# Allegro board ESP322.brd
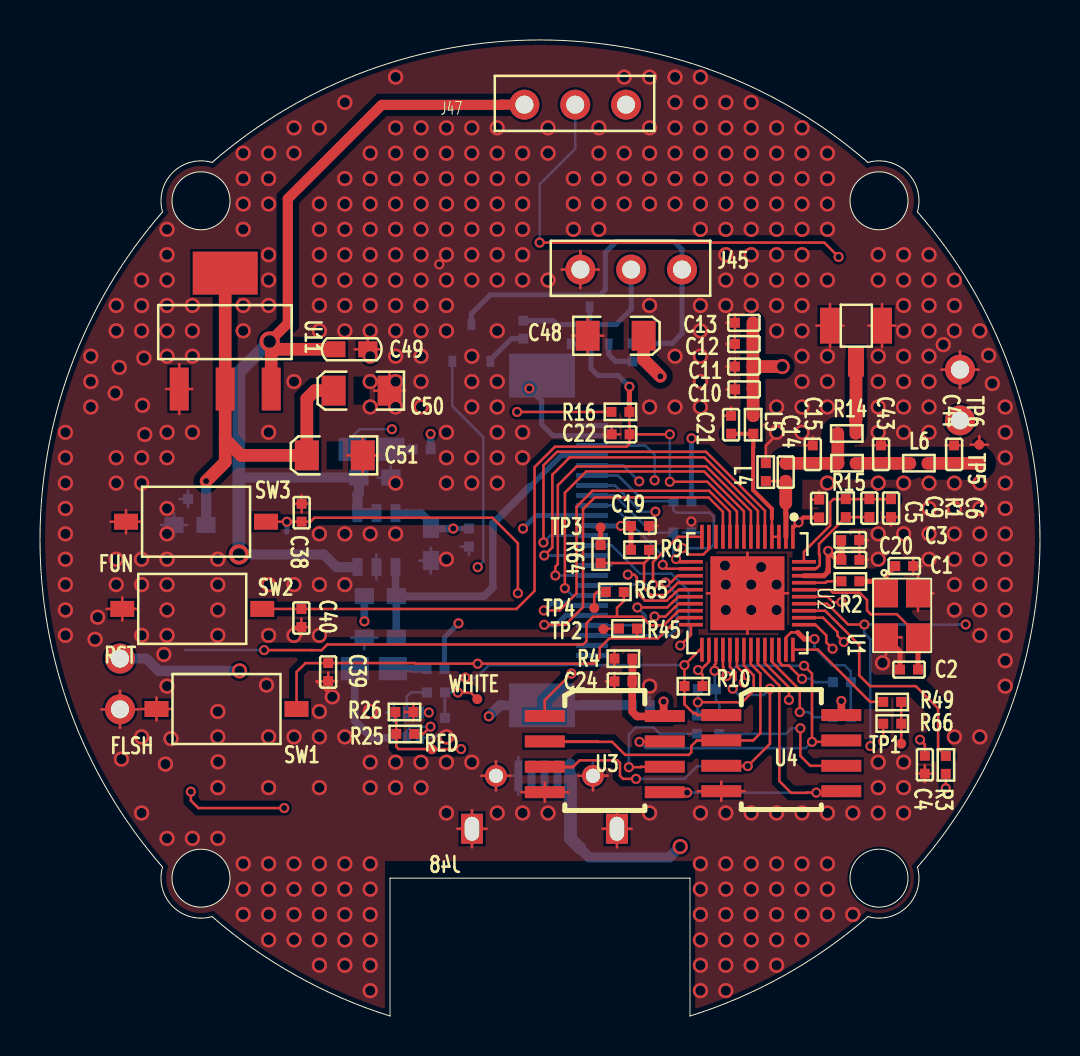
[diagram p0: board, top side]
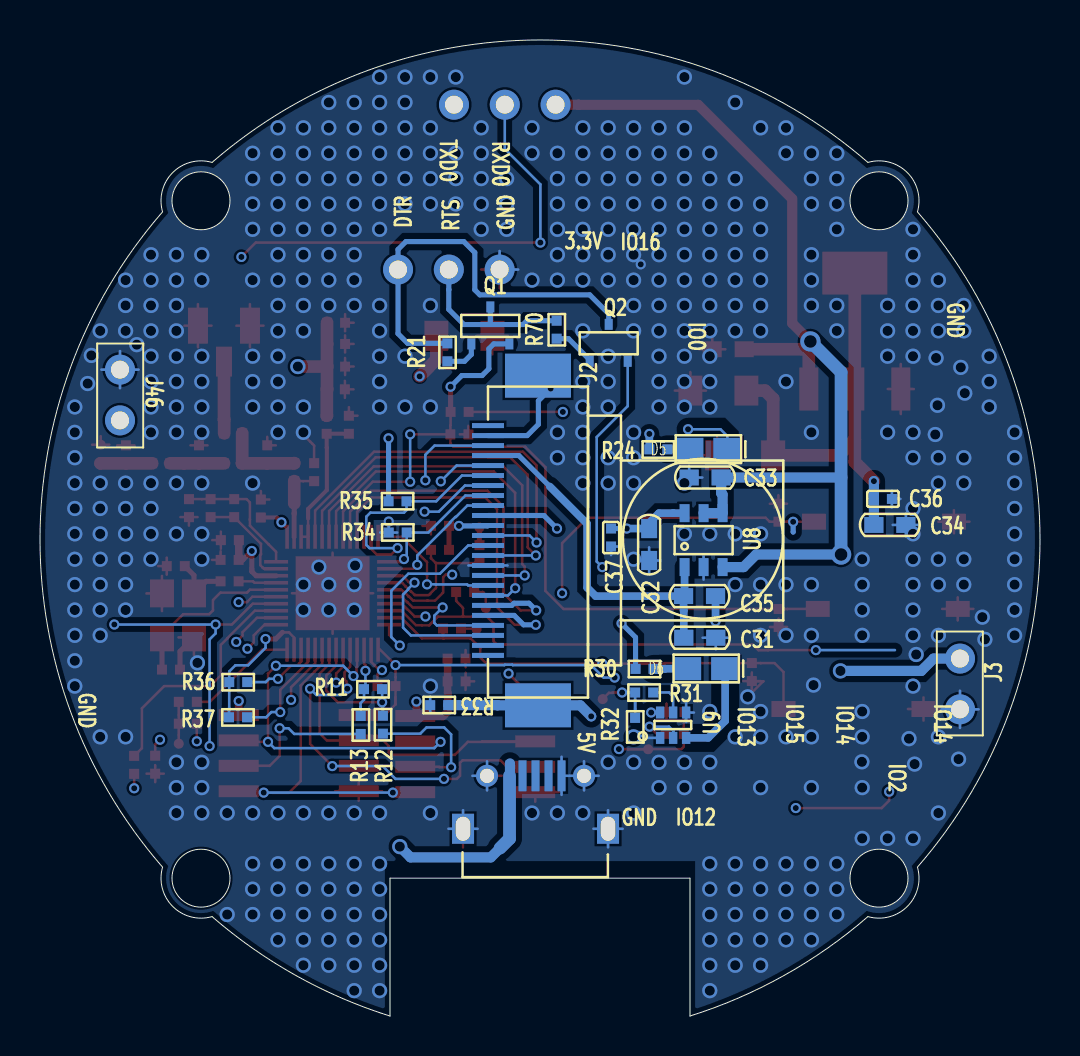
[diagram p1: board, bottom side, seen from below]

Outline 50 x 48.85 mm; copper layers: TOP, GND, SIG, BOTTOM. Coordinates in mm from the lower left corner of the outline.
Outline path: circle c8.05,40.8 r1.45 ; circle c8.05,6.9 r1.45 ; circle c41.95,40.8 r1.45 ; circle c41.95,6.9 r1.45 ; 6.13,40.25 arc(6.64,42.21) 8.6,42.72 arc(25,48.85) 41.4,42.72 arc(43.36,42.21) 43.87,40.25 arc(50,23.85) 43.87,7.45 arc(43.36,5.48) 41.4,4.98 arc(37.2,2.03) 32.5,0 32.5,6.9 17.5,6.9 17.5,0 arc(12.8,2.03) 8.6,4.98 arc(6.64,5.48) 6.13,7.45 arc(0,23.85) 6.13,40.25

## Design rules (mm)
net group DTR: nets DTR N16908429
net group IO21: nets IO21 N16845223
net group IO22: nets IO22 N16845342
net group RTS: nets N16908427 RTS
net group RF: nets N16845246 N16845248 N16845297 N16845299 N16860839 N16860948 N16861170 N16861179 N16861214 N16861260 N16861530 N16861598 N16861944 N16863419 N16863538 N16884685

## Placement (name value [footprint] x y rotation side)
C1  22pF/6.3V(10%)  [C0402]  42.76 22.52 0 top
C2  22pF/6.3V(10%)  [C0402]  43.9 17.34 180 top
C3  100pF/6.3V(10%)  [C0402]  40.06 23.82 0 top
C4  0.1uF/6.3V(10%)  [C0402]  44.24 13.03 270 top
C5  10nF/6.3V(10%)  [C0402]  42.55 25.87 270 top
C6  3.3nF/6.3V(10%)  [C0402]  41.47 24.97 90 top
C9  0.1uF/6.3V(10%)  [C0402]  38.96 24.95 90 top
C10  0.1uF/6.3V(10%)  [C0402]  35.66 31.36 180 top
C11  1uF/10V(20%)  [C0402]  35.65 32.5 180 top
C12  10uF/6.3V(20%)  [C0402]  35.65 33.64 180 top
C13  10uF/6.3V(20%)  [C0402]  35.65 34.7 180 top
C14  6.8pF  [C0402]  37.29 26.77 90 top
C15  2.4pF  [C0402]  38.64 28.56 270 top
C19  0.1uF/6.3V(10%)  [C0402]  29.55 24.53 0 top
C20  1uF/10V(20%)  [C0402]  40.07 22.83 0 top
C21  NC  [C0402]  34.55 29.14 90 top
C22  1uF/10V(20%)  [C0402]  29.48 29.11 180 top
C24  1uF/10V(20%)  [C0402]  29.62 16.75 180 top
C31  10uF/10V(20%)  [C0603]  16.21 18.93 0 bottom
C32  10uF/10V(20%)  [C0603]  19.54 22.8 90 bottom
C33  10uF/10V(20%)  [C0603]  17.54 26.95 180 bottom
C34  4.7uF/10V(20%)  [C0603]  8.3 24.58 180 bottom
C35  4.7uF/10V(20%)  [C0603]  17.82 21.02 180 bottom
C36  0.1uF/16V(10%)  [C0402]  8.3 25.88 180 bottom
C37  1uF/10V(20%)  [C0402]  21.44 24.4 270 bottom
C38  0.1uF/16V(10%)  [C0402]  13.08 25.64 270 top
C39  0.1uF/16V(10%)  [C0402]  14.41 16.77 90 top
C40  0.1uF/16V(10%)  [C0402]  13.07 19.47 90 top
C43  1.0pF  [C0402]  42.05 28.56 270 top
C44  1.5pF  [C0402]  45.7 28.56 270 top
C48  47uF/6.3V(20%)  [C1206]  30.18 34.05 0 top
C49  10uF/16V  [C0603]  14.79 33.37 0 top
C50  22uF/16V  [C1206]  14.68 31.3 180 top
C51  10uF/16V  [C1206]  13.34 28.06 180 top
D5  RED LED  [LED0805]  17.53 28.36 180 bottom
D6  WHITE LED  [LED0805]  17.64 17.38 180 bottom
J2  FFC_24P_0P5  [OV9650FSL_PCB]  27.6 29.55 90 bottom
J3  CON2  [CON_2_54_2P]  4 15.35 90 bottom
J39  IPEX(NC)  [ECT8180001581]  40.8 32.75 0 top
J45  CON3  [CON_2_54_3P]  27.02 37.36 0 top
J46  CON2  [CON_2_54_2P]  46 32.35 270 bottom
J47  CON3  [CON_2_54_3P]  24.22 45.61 0 top
J48  CON9  [MICROUSB]  23.92 12.02 0 bottom
L4  2.4nH  [R0402]  36.29 26.77 90 top
L5  2.0nH  [R0402]  35.67 29.14 90 top
L6  2.0nH  [R0402]  43.49 27.66 0 top
Q1  S8050(NPN)  [SOT23-3]  27.48 35.49 180 bottom
Q2  S8050(NPN)  [SOT23-3]  21.57 34.62 180 bottom
R1  20K(5%)  [R0402]  40.29 24.97 90 top
R2  51R(5%)  [R0402]  40.97 21.76 180 top
R3  499R(1%)  [R0402]  45.29 13.02 270 top
R4  2K(5%)(NC)  [R0402]  29.62 17.89 180 top
R9  10K(1%)(NC)  [R0402]  29.55 23.33 0 top
R10  10K(1%)  [R0402]  33.12 16.51 180 top
R11  0R(5%)(NC)  [R0402]  32.9 16.36 0 bottom
R12  0R(5%)  [R0402]  32.85 15.03 270 bottom
R13  0R(5%)  [R0402]  33.96 15.02 270 bottom
R14  0R(5%)  [R0402]  40.79 29.16 180 top
R15  0R(5%)  [R0402]  39.9 27.66 0 top
R16  10K(1%)  [R0402]  28.57 30.23 0 top
R21  12K(1%)  [R0402]  29.63 33.67 270 bottom
R24  1K(1%)  [R0402]  18.63 28.36 0 bottom
R25  1K(1%)  [R0402]  18.71 14.12 180 top
R26  10K(1%)  [R0402]  17.77 15.21 0 top
R30  1K(1%)  [R0402]  19.32 17.37 0 bottom
R31  1K(1%)  [R0402]  19.34 16.19 0 bottom
R32  10K(1%)  [R0402]  20.24 14.92 270 bottom
R33  0R(5%)  [R0402]  30.49 15.56 180 bottom
R34  10K(1%)  [R0402]  32.56 24.2 180 bottom
R35  10K(1%)  [R0402]  32.57 25.76 180 bottom
R36  3.3K(5%)  [R0402]  39.64 16.71 0 bottom
R37  3.3K(5%)  [R0402]  39.65 14.95 0 bottom
R45  0R(5%)  [R0402]  28.95 19.39 0 top
R49  0R(5%)  [R0402]  43.06 15.72 180 top
R64  0R(5%)  [R0402]  28.03 23.57 270 top
R65  0R(5%)  [R0402]  28.29 21.22 0 top
R66  10K(1%)  [R0402]  42.16 14.63 0 top
R70  12K(1%)  [R0402]  24.17 34.8 270 bottom
RED  Red  [TP1]  19.59 13.35 0 top
SW1  SW PUSHBUTTON  [KEY_3X6]  5.83 15.37 0 top
SW2  SW PUSHBUTTON  [KEY_3X6]  4.11 20.38 0 top
SW3  SW PUSHBUTTON  [KEY_3X6]  4.3 24.74 0 top
TP1  Red  [TP1]  43.06 13.63 0 top
TP2  Red  [TP1]  28.17 19.36 0 top
TP3  Red  [TP1]  28.03 24.45 0 top
TP4  Red  [TP1]  27.71 20.42 0 top
TP5  Red  [TP1]  46.97 27.66 0 top
TP6  Red  [TP1]  46.96 28.59 0 top
U1  40MHz+/-10ppm  [CRY_3225]  43.9 21.15 270 top
U2  ESP32-D0WD  [QFN48_5X5]  35.37 21.16 270 top
U3  EN25QH128A  [RZ7889]  28.32 9.99 0 top
U4  PSRAM  [RZ7889]  37.15 10.04 0 top
U8  RT9011-BM-PJ6  [SOT-23-6]  16.82 23.82 180 bottom
U9  SI1902CDL  [SOT363]  18.99 13.92 180 bottom
U11  TLV1117-33IDCY  [SOT223]  6.96 31.38 0 top
WHITE  Red  [TP1]  21.87 15.86 0 top

## Library data of the parts
C1-C6 C9-C15 C19-C22 C24 C31-C40 C43 C44 C48-C51 = CAP NP
D5 D6 = LED_6
J2 = CON24_4
J3 J46 = CON2
J39 = IPEX_0
J45 J47 = CON3
J48 = CON9
L4-L6 = CHOKE
Q1 Q2 = NPN BCE
R1-R4 R9-R15 R45 R49 R64-R66 = RESISTOR
R16 = RESISTOR_0: signal model: DEFAULT_RESISTOR_10000OHM_1_2
R21 R24-R26 R30-R32 R34-R37 R70 = RESISTOR_0: signal model: DEFAULT_RESISTOR_200OHM_1_2
R33 = RESISTOR_0
RED TP1-TP6 WHITE = TEST POINT_0
SW1 = SW PUSHBUTTON_0
SW2 SW3 = SW PUSHBUTTON
U1 = X1_1
U2 = ESP8080_24
U3 = FLASH_3
U4 = PN18S32
U8 = NCP1117_3
U9 = D-NMOS_1
U11 = TLV1117-33IDCY

## Footprints (pads in the part's own frame, mm; a bottom-side part is the same pattern mirrored in y, then rotated)
C0402
  rect 0.5x0.5 smd: 1(0,0) 2(0.9,0)
C0603
  rect 0.96x0.8 smd: 1(0,0) 2(1.6,0)
C1206
  rect 1.2x1.5 smd: 1(0,0) 2(-2.8,0)
CON_2_54_2P
  round 1.5 hole 0.9: 1(0,0) 2(2.54,0)
CON_2_54_3P
  round 1.5 hole 0.9: 1(0,0) 2(2.54,0) 3(5.08,0)
CRY_3225
  rect 1.4x1.2 smd: 1(0,-1.6) 2(2.2,-1.6) 3(2.2,0) 4(0,0)
ECT8180001581
  rect 0.8x1.5 smd: 1(0,0)
  rect 1x1.8 smd: 2(-1.3,1.8) 3(1.3,1.8)
KEY_3X6
  rect 1.2x0.8 smd: 1(0,0) 2(7,0)
LED0805
  rect 1.4x1.15 smd: 1(0,0) 2(1.9,0)
MICROUSB
  rect 0.4x1.55 smd: 1(2.6,0) 2(1.95,0) 3(1.3,0) 4(0.65,0) 5(0,0)
  round 1.1 hole 0.71: 6(-1.125,0) 7(3.725,0)
  rect 1.1x1.5 hole 0.72x1.2: 8(-2.325,2.65) 9(4.925,2.65)
OV9650FSL_PCB
  rect 0.25x1.6 smd: 1(0,0) 2(-0.5,0) 3(-1,0) 4(-1.5,0) 5(-2,0) 6(-2.5,0) 7(-3,0) 8(-3.5,0) 9(-4,0) 10(-4.5,0) 11(-5,0) 12(-5.5,0) 13(-6,0) 14(-6.5,0) 15(-7,0) 16(-7.5,0) 17(-8,0) 18(-8.5,0) 19(-9,0) 20(-9.5,0) 21(-10,0) 22(-10.5,0) 23(-11,0) 24(-11.5,0)
  rect 2.2x3.3 smd: 25(-14,-2.5) 26(2.5,-2.5)
QFN48_5X5
  rect 1.2x0.18 smd: 1(-2.825,2.275) 2(-2.825,1.925) 3(-2.825,1.575) 4(-2.825,1.225) 5(-2.825,0.875) 6(-2.825,0.525) 7(-2.825,0.175) 8(-2.825,-0.175) 9(-2.825,-0.525) 10(-2.825,-0.875) 11(-2.825,-1.225) 12(-2.825,-1.575) 13(-2.825,-1.925) 14(-2.825,-2.275) 25(2.825,-2.275) 26(2.825,-1.925) 27(2.825,-1.575) 28(2.825,-1.225) 29(2.825,-0.875) 30(2.825,-0.525) 31(2.825,-0.175) 32(2.825,0.175) 33(2.825,0.525) 34(2.825,0.875) 35(2.825,1.225) 36(2.825,1.575) 37(2.825,1.925) 38(2.825,2.275)
  rect 0.18x1.2 smd: 15(-1.575,-2.825) 16(-1.225,-2.825) 17(-0.875,-2.825) 18(-0.525,-2.825) 19(-0.175,-2.825) 20(0.175,-2.825) 21(0.525,-2.825) 22(0.875,-2.825) 23(1.225,-2.825) 24(1.575,-2.825) 39(1.575,2.825) 40(1.225,2.825) 41(0.875,2.825) 42(0.525,2.825) 43(0.175,2.825) 44(-0.175,2.825) 45(-0.525,2.825) 46(-0.875,2.825) 47(-1.225,2.825) 48(-1.575,2.825)
  rect 3.7x3.7 smd: 49(0,0)
R0402
  rect 0.5x0.5 smd: 1(0,0) 2(0.9,0)
RZ7889
  rect 2x0.6 smd: 1(-3.082,5.025) 2(-3.082,3.755) 3(-3.082,2.485) 4(-3.082,1.215) 5(2.918,1.215) 6(2.918,2.485) 7(2.918,3.755) 8(2.918,5.025)
SOT23-3
  rect 0.4x0.55 smd: 1(-0.95,-1.85) 2(0.95,-1.85) 3(0,0)
SOT223
  rect 0.95x2.15 smd: 1(0,0) 2(2.3,0) 3(4.6,0)
  rect 3.25x2.15 smd: 4(2.3,5.8)
SOT363
  rect 0.42x0.6 smd: 1(0,0) 2(0.65,0) 3(1.3,0) 4(1.3,1.27) 5(0.65,1.27) 6(0,1.27)
SOT-23-6
  rect 0.5x0.9 smd: 1(-0.95,-1.35) 2(0,-1.35) 3(0.95,-1.35) 4(0.95,1.35) 5(0,1.35) 6(-0.95,1.35)
TP1
  round 0.5 smd: 1(0,0)

## Nets
AGND: C35.2 J2.2(AGND) J2.25(GND#25) J2.26(GND#26) R33.2
AVDD_2V8: C31.2 C35.1 J2.4(AVDD) U8.1(VOUT2)
DVDD_1V3: C32.2 C37.1 J2.10(DVDD) U8.6(VOUT1)
GND: C1.2 C2.2 C3.2 C4.2 C5.2 C9.2 C10.2 C11.2 C12.2 C13.2 C15.1 C19.2 C20.2 C21.2 C22.2 C24.2 C31.1 C32.1 C33.1 C34.2 C36.2 C37.2 C38.1 C39.1 C40.1 C43.1 C44.1 C48.2 C49.2 C50.2 C51.2 J2.15(DGND) J3.1 J39.2(GND1) J39.3(GND2) J45.1 J46.1 J48.5 J48.6 J48.7 J48.8 J48.9 L4.2 R4.2 R26.2 R32.2 R33.1 R34.1 SW1.1 SW2.1 SW3.1 TP6.1 U1.2(GND#2) U1.4(GND#4) U2.49(GND) U3.4(GND) U4.4(VSS) U8.2(GND) U9.1(S1) U9.4(S2) U11.1(ADJ/GND)
VBUS: C33.2 C49.1 J3.2 J47.1 J48.1 U8.3(EN2) U8.4(EN1) U8.5(VIN) U11.3(INPUT)
VDD_SDIO: C24.1 R4.1 R10.1 U2.26(VDD_SDIO) U3.8(VCC) U4.8(VDD)
CAM_RESET: J2.6(RESET) R35.2 U2.13(32K_XN)
DOVDD_3V3: C3.1 C4.1 C9.1 C10.1 C11.1 C12.1 C13.1 C19.1 C20.1 C34.1 C36.1 C48.1 C50.1 C51.1 J2.11(DOVDD) L5.2 R9.1 R16.1 R24.2 R30.2 R35.1 R36.2 R37.2 R66.1 U2.1(VDDA#1) U2.19(VDD3P3_RTC) U2.37(VDD3P3_CPU) U2.43(VDDA#43) U2.46(VDDA#46) U11.2(OUTPUT#2) U11.4(OUTPUT#4)
DTR: J45.3 Q2.3(E) R21.1
DVP_HREF: J2.9(HREF) U2.16(GPIO27)
DVP_PCLK: J2.17(PCLK) U2.14(GPIO25)
DVP_VSYNC: J2.7(VSYNC) U2.34(GPIO5)
DVP_Y2: J2.19(Y2) U2.10(VDET_1)
DVP_Y3: J2.21(Y3) U2.20(MTCK)
DVP_Y4: J2.22(Y4) U2.17(MTMS)
DVP_Y5: J2.20(Y5) U2.11(VDET_2)
DVP_Y6: J2.18(Y6) U2.8(SENSOR_VN)
DVP_Y7: J2.16(Y7) U2.7(SENSOR_CAPN)
DVP_Y8: J2.14(Y8) U2.6(SENSOR_CAPP)
DVP_Y9: J2.12(Y9) U2.5(SENSOR_VP)
EN: C22.1 C40.2 Q1.2(C) R16.2 SW2.2 U2.9(CHIP_PU)
FLASH_CLK: R12.2 U3.6(CLK)
I2C_SCL: J2.5(SCL) R36.1 U2.36(GPIO23)
I2C_SDA: J2.3(SDA) R37.1 U2.35(GPIO18)
IO0: C39.2 Q2.2(C) R45.2 SW1.2 U2.23(GPIO0)
IO2: R65.2 U2.22(GPIO2)
IO4: J2.13(XCLK) U2.24(GPIO4)
IO12: R9.2 R64.2 U2.18(MTDI)
IO15: C38.2 SW3.2 U2.21(MTDO)
IO16: R10.2 U2.25(GPIO16) U4.1(CS#)
IO17: R11.2 R13.1 U2.27(GPIO17)
IO19: R49.2 U2.38(GPIO19)
IO21: J46.2 R25.2 R26.1 RED.1 U2.42(GPIO21)
IO22: R31.2 R32.1 U2.39(GPIO22) WHITE.1
IO32: U2.12(32K_XP)
PWDN: J2.8(PWDN) R34.2 U2.15(GPIO26)
RTS: J45.2 Q1.3(E) R70.1
RXD0: J47.2 U2.40(U0RXD)
SCK/CLK: R11.1 R12.1 U2.31(SD_CLK)
SCS/CMD: U2.30(SD_CMD) U3.1(/CS)
SDI/SD1: U2.33(SD_DATA_1) U3.5(DI) U4.5(SI/SIO0)
SDO/SD0: U2.32(SD_DATA_0) U3.2(DO) U4.2(SO/SIO1)
SHD/SD2: U2.28(SD_DATA_2) U3.7(/HOLD) U4.7(SIO3)
SPI_CLK: R45.1 TP2.1
SPI_CS: R49.1 R66.2 TP1.1
SPI_DATAIN: R65.1 TP4.1
SPI_DATAOUT: R64.1 TP3.1
SRAM_CLK: R13.2 U4.6(SCLK)
SWP/SD3: U2.29(SD_DATA_3) U3.3(/WP) U4.3(SIO2)
TXD0: J47.3 R3.2
N16845223: R25.1 U9.2(G1)
N16845246: D5.2(CATHODE) U9.6(D1)
N16845248: D5.1(ANODE) R24.1
N16845297: D6.2(CATHODE) U9.3(D2)
N16845299: D6.1(ANODE) R30.1
N16845342: R31.1 U9.5(G2)
N16860839: C5.1 C6.2 R1.2 U2.48(CAP1)
N16860948: C21.1 L5.1 U2.3(VDD3P3#3) U2.4(VDD3P3#4)
N16861170: C14.2 C15.2 R14.2 R15.1
N16861179: C2.1 U1.3(XOUT) U2.44(XTAL_N)
N16861214: C1.1 R2.1 U1.1(XIN)
N16861260: C6.1 R1.1 U2.47(CAP2)
N16861530: R3.1 U2.41(U0TXD)
N16861598: R2.2 U2.45(XTAL_P)
N16861944: J39.1(RF) R14.1
N16863419: C43.2 L6.1 R15.2
N16863538: C44.2 L6.2 TP5.1
N16884685: C14.1 L4.1 U2.2(LNA_IN)
N16908427: Q2.1(B) R70.2
N16908429: Q1.1(B) R21.2

Pads without a net: J2 1 23 24; J48 2 3 4

## Via types
v1: diameter 0.508, hole 0.305, TOP to BOTTOM, 85 vias
v2: diameter 0.762, hole 0.508, TOP to BOTTOM, 459 vias
v3: diameter 1.016, hole 0.635, TOP to BOTTOM, 2 vias

## Routing (per net, layer and track width the routed paths; a pad name or vN(x,y) marks a point on that pad's centre or on a via; arc(x,y) is an arc through that point)
AGND: length 13.4
  BOTTOM w0.254: v1(24.47,31.4) 25.08,30.79 25.08,29.61 25.64,29.05 J2.2
  BOTTOM w0.381: C35.2 v1(16.22,19.75)
  BOTTOM w0.508: v1(22.44,15) 22.99,15.55 J2.25 27.13,15.55 27.14,15.56 R33.2
AVDD_2V8: length 18.1
  BOTTOM w0.254: J2.4 26.06,28.05 24.51,26.5
  BOTTOM w0.381: C35.1 17.77,21.07 U8.1 ; C35.1 17.82,20.3 17.81,20.29 C31.2 ; C35.1 22.22,21.02 22.65,21.45 22.65,24.64 24.51,26.5
DVDD_1V3: length 11.4
  SIG w0.508: 21.76,24.4 v1(20.66,24.4)
  SIG w0.635: v1(24.15,24.4) 21.76,24.4
  BOTTOM w0.254: v1(24.15,24.4) 24.8,25.05 J2.10 ; v1(20.66,24.4) 20.66,24.4 C37.1
  BOTTOM w0.381: U8.6 18.34,25.17 18.34,25.17 19.05,25.17 19.54,24.68 C32.2 v1(20.66,24.4)
GND: length 170.4
  TOP w0.127: 40.96,23.39 C3.2 ; C3.2 41.39,23.82 ; C3.2 40.96,24.25 ; 38.53,25.85 C9.2 38.96,26.28 ; C1.2 44.09,22.52 ; C1.2 43.66,22.94 ; C1.2 43.66,22.09 ; 32.89,11.25 U4.4 ; U4.4 34.06,10.77 ; U4.4 35.24,11.25 ; U4.4 34.06,11.73 ; J39.3 42.1,35.63 ; J39.3 41.42,34.55 ; J39.3 42.78,34.55 ; J39.3 42.1,33.47 ; 34.32,32.5 C11.2 ; C11.2 34.75,32.93 ; C11.2 34.75,32.08 ; J39.2 39.5,35.63 ; J39.2 38.82,34.55 ; J39.2 40.18,34.55 ; J39.2 39.5,33.47 ; 4.3,24.16 SW3.1 ; SW3.1 4.3,25.32 ; SW3.1 3.52,24.74 ; SW3.1 5.08,24.74 ; 18.24,15.21 R26.2 ; R26.2 18.67,15.64 ; R26.2 18.67,14.78 ; 5.83,14.79 SW1.1 ; SW1.1 5.05,15.37 ; SW1.1 5.83,15.94 ; SW1.1 6.6,15.37 ; C4.2 44.24,12.56 ; C4.2 44.24,11.7 ; C4.2 44.67,12.13 ; C4.2 43.81,12.13 ; 34.32,33.64 C12.2 ; C12.2 34.75,34.06 ; C12.2 34.75,33.21 ; C22.2 29.01,29.11 ; C22.2 28.15,29.11 ; C22.2 28.58,29.54 ; 26.09,37.36 J45.1 ; J45.1 27.95,37.36 ; J45.1 27.02,36.43 ; J45.1 27.02,38.29 ; TP6.1 47.39,28.59 ; TP6.1 46.54,28.59 ; TP6.1 46.96,29.02 ; 34.75,34.27 C13.2 ; C13.2 34.32,34.7 ; C13.2 34.75,35.12 ; 21.6,8.44 J48.8 ; J48.8 22.33,9.37 ; J48.8 21.6,10.3 ; J48.8 20.87,9.37 ; U3.4 25.24,11.68 ; U3.4 24.06,11.2 ; U3.4 25.24,10.73 ; U3.4 26.42,11.2 ; 42.12,24.97 C5.2 ; C5.2 42.55,24.54 ; C5.2 42.98,24.97 ; 34.13,30.04 C21.2 34.55,30.47 ; 12.64,19.47 C40.1 ; C40.1 13.07,19.04 ; C40.1 13.5,19.47 ; C40.1 13.07,19.9 ; 28.12,9.37 J48.9 ; J48.9 29.58,9.37 ; J48.9 28.85,8.44 ; J48.9 28.85,10.3 ; 28.72,16.32 C24.2 ; C24.2 28.72,17.18 ; C24.2 28.29,16.75 ; C50.2 18.26,31.3 ; C50.2 17.48,32.23 ; C50.2 17.48,30.37 ; C50.2 16.7,31.3 ; U2.49 37.4,21.16 ; U2.49 35.37,19.13 ; U2.49 33.34,21.16 ; U2.49 35.37,23.19 ; 6.96,30.13 U11.1 ; U11.1 6.96,32.63 ; U11.1 6.31,31.38 ; U11.1 7.61,31.38 ; 26.92,12.02 J48.7 ; J48.7 27.65,11.29 ; J48.7 28.38,12.02 ; L4.2 36.29,28.55 36.79,29.04 ; 3.07,15.35 J3.1 ; J3.1 4,16.28 ; J3.1 4,14.42 ; J3.1 4.93,15.35 ; C49.2 16.39,33.95 ; C49.2 15.73,33.37 ; C49.2 17.05,33.37 ; 30.45,24.1 C19.2 30.88,24.53 ; 22.07,12.02 J48.6 ; J48.6 22.8,12.75 ; J48.6 23.53,12.02 ; J48.6 22.8,11.29 ; 14.41,16.34 C39.1 ; C39.1 14.84,16.77 ; C39.1 14.41,17.19 ; C39.1 13.98,16.77 ; 13.83,16.75 13.84,16.75 ; 13.84,16.75 v2(14.61,15.97) ; 13.84,16.75 14.25,16.75 ; 3.33,20.38 SW2.1 ; SW2.1 4.11,20.95 ; SW2.1 4.89,20.38 ; SW2.1 4.11,19.8 ; 34.33,31.36 C10.2 ; C10.2 34.76,31.79 ; C10.2 34.76,30.94 ; C48.2 28.16,34.05 ; C48.2 26.6,34.05 ; C48.2 27.38,33.12 ; C48.2 27.38,34.97 ; U1.4 44.68,21.15 ; U1.4 43.9,20.27 ; U1.4 43.9,22.03 ; 41.4,22.83 C20.2 40.97,23.25 ; 16.14,27.13 C51.2 ; C51.2 15.36,28.06 ; C51.2 16.14,28.99 ; C51.2 16.92,28.06 ; 38.64,28.99 C15.1 38.21,28.56 ; 43.08,18.95 U1.2 42.3,18.07 ; J46.1 46,33.28 ; J46.1 45.07,32.35 ; J46.1 46.93,32.35 ; J46.1 46,31.42 ; 28.72,18.32 R4.2 28.72,17.46 ; C43.1 42.05,28.99 ; C43.1 42.48,28.56 ; C43.1 41.62,28.56 ; 13.08,25.21 C38.1 ; C38.1 13.51,25.64 ; C38.1 12.65,25.64 ; C38.1 13.08,26.07 ; 46.13,28.56 C44.1 45.28,28.56
  TOP w0.254: C2.2 43,18.25 U1.2
  GND w0.127: 21.6,8.44 J48.8 ; J48.8 21.6,10.3 ; J48.8 20.87,9.37 ; J48.8 22.33,9.37 ; 27.65,11.29 J48.7 ; J48.7 27.65,12.75 ; J48.7 28.38,12.02 ; J48.7 26.92,12.02 ; 26.09,37.36 J45.1 ; J45.1 27.02,38.29 ; J45.1 27.02,36.43 ; J45.1 27.95,37.36 ; 22.8,11.29 J48.6 ; J48.6 22.07,12.02 ; J48.6 23.53,12.02 ; J48.6 22.8,12.75 ; J48.9 29.58,9.37 ; J48.9 28.85,8.44 ; J48.9 28.85,10.3 ; J48.9 28.12,9.37 ; J46.1 46,33.28 ; J46.1 46,31.42 ; J46.1 46.93,32.35 ; J46.1 45.07,32.35 ; J3.1 4.93,15.35 ; J3.1 3.07,15.35 ; J3.1 4,14.42 ; J3.1 4,16.28
  BOTTOM w0.127: 16.82,21.84 U8.2 16.82,23.1 ; 21.44,23.07 C37.2 21.02,23.5 ; 15.55,18.93 C31.1 ; C31.1 16.21,18.36 ; C31.1 16.87,18.93 ; J48.9 28.85,10.3 ; J48.9 29.58,9.37 ; J48.9 28.12,9.37 ; C34.2 6.71,25.16 ; C34.2 7.36,24.58 ; C34.2 6.05,24.58 ; C34.2 6.71,24 ; 26.09,37.36 J45.1 27.02,38.29 ; 23.92,11.07 J48.5 ; J48.5 23.55,12.02 ; J48.5 23.92,12.97 ; R34.1 32.99,24.2 ; R34.1 v1(32.56,24.75) ; R34.1 32.14,24.2 ; 20.87,9.37 J48.8 ; J48.8 21.6,8.44 ; J48.8 22.33,9.37 ; J48.8 21.6,10.3 ; J46.1 46.93,32.35 ; J46.1 45.07,32.35 ; J46.1 46,33.28 ; J46.1 46,31.42 ; 16.88,26.95 C33.1 17.54,27.53 ; 22.8,11.29 J48.6 ; J48.6 22.07,12.02 ; J48.6 22.8,12.75 ; J48.6 23.53,12.02 ; R32.2 19.8,14.02 19.7,13.92 U9.1 ; 18.97,22.8 C32.1 ; C32.1 20.12,22.8 ; C32.1 19.54,23.45 ; C32.1 19.54,22.14 ; J3.1 4,16.28 ; J3.1 4.93,15.35 ; J3.1 4,14.42 ; J3.1 3.07,15.35 ; 26.62,22.55 J2.15 28.58,22.55 ; J48.7 27.65,12.75 ; J48.7 27.65,11.29 ; J48.7 28.38,12.02 ; U9.4 17.69,15.67 ; U9.4 17.31,15.19 ; U9.4 17.69,14.71 ; 30.49,15.99 R33.1 30.49,15.13 ; 6.98,25.88 C36.2 ; C36.2 7.4,25.45 ; C36.2 7.4,26.31
  vias: v1(19.96,37.62) v2(1.27,29.21) v2(1.27,27.94) v2(1.27,26.67) v2(1.27,25.4) v2(1.27,24.13) v2(1.27,22.86) v2(1.27,21.59) v2(1.27,20.32) v2(1.27,19.05) v2(2.54,33.02) v2(2.54,31.75) v2(2.54,30.48) v2(2.75,18.85) v2(2.88,19.96) v2(3.81,35.56) v2(3.81,34.29) v2(3.76,31.17) v2(3.81,27.94) v2(3.81,26.67) v2(3.81,22.86) v2(3.81,21.59) v2(3.96,32.46) v2(4.07,12.86) v2(5.08,36.83) v2(5.08,35.56) v2(5.08,34.29) v2(5.13,30.57) v2(5.08,27.94) v2(5.08,26.67) v2(5.08,22.86) v2(5.08,21.59) v2(5.08,19.05) v2(5.08,13.97) v2(5.08,10.16) v2(5.2,32.93) v2(5.24,29.1) v2(6.19,18.09) v2(6.27,12.61) v2(6.35,39.37) v2(6.35,38.1) v2(6.35,36.83) v2(6.35,35.56) v2(6.35,34.29) v2(6.35,33.02) v2(6.35,29.21) v2(6.35,27.94) v2(6.35,25.4) v2(6.35,24.13) v2(6.35,22.86) v2(6.35,21.59) v2(6.35,20.32) v2(6.35,19.05) v2(6.35,16.51) v2(6.35,8.89) v2(6.55,13.88) v2(7.62,35.56) v2(7.62,34.29) v2(7.62,33.02) v2(7.62,29.21) v2(7.62,8.89) v2(8.89,22.86) v2(8.89,21.59) v2(8.89,20.32) v2(8.89,19.05) v2(8.89,15.24) v2(8.89,13.97) v2(8.91,12.72) v2(8.89,11.43) v2(8.89,8.89) v2(10.16,43.18) v2(10.16,41.91) v2(10.16,40.64) v2(10.16,39.37) v2(10.16,35.56) v2(10.16,34.29) v2(10.16,7.62) v2(10.16,6.35) v2(10.16,5.08) v2(11.33,16.56) v2(11.43,43.18) v2(11.43,41.91) v2(11.43,40.64) v2(11.43,38.1) v2(11.43,36.83) v2(11.43,35.56) v2(11.43,29.21) v2(11.43,21.59) v2(11.43,19.05) v2(11.43,13.97) v2(11.43,11.43) v2(11.43,7.62) v2(11.43,6.35) v2(11.43,5.08) v2(11.43,3.81) v2(12.7,44.45) v2(12.7,43.18) v2(12.7,31.75) v2(12.7,21.59) v2(12.7,19.05) v2(12.7,13.97) v2(12.7,7.62) v2(12.7,6.35) v2(12.7,5.08) v2(12.7,3.81) v2(13.97,44.45) v2(13.97,40.64) v2(13.97,39.37) v2(13.97,38.1) v2(13.97,36.83) v2(13.97,35.56) v2(13.97,34.29) v2(13.97,24.13) v2(13.97,21.59) v2(13.97,19.05) v2(13.97,15.24) v2(13.97,13.97) v2(13.97,11.43) v2(13.97,7.62) v2(13.97,6.35) v2(13.97,5.08) v2(13.97,3.81) v2(13.97,2.54) v2(15.24,45.72) v2(15.24,41.91) v2(15.24,40.64) v2(15.24,39.37) v2(15.24,38.1) v2(15.24,36.83) v2(15.24,35.56) v2(15.24,34.29) v2(15.24,24.13) v2(15.24,21.59) v2(15.24,13.97) v2(15.24,7.62) v2(15.24,6.35) v2(15.24,5.08) v2(15.24,3.81) v2(15.24,2.54) v2(16.51,43.18) v2(16.51,41.91) v2(16.51,40.64) v2(16.51,39.37) v2(16.51,38.1) v2(16.51,36.83) v2(16.51,35.56) v2(16.51,34.29) v2(16.51,33.02) v2(16.51,31.75) v2(16.51,30.48) v2(16.51,24.13) v2(16.51,15.24) v2(16.51,12.7) v2(16.51,11.43) v2(16.51,7.62) v2(16.51,6.35) v2(16.51,5.08) v2(16.51,3.81) v2(16.51,2.54) v2(16.51,1.27) v2(17.78,46.99) v2(17.78,44.45) v2(17.78,43.18) v2(17.78,41.91) v2(17.78,40.64) v2(17.78,39.37) v2(17.78,38.1) v2(17.78,36.83) v2(17.78,35.56) v2(17.78,34.29) v2(17.78,33.02) v2(17.78,31.75) v2(17.78,30.48) v2(17.78,26.67) v2(17.78,24.13) v2(17.78,12.7) v2(17.78,11.43) v2(19.05,44.45) v2(19.05,43.18) v2(19.05,41.91) v2(19.05,40.64) v2(19.05,39.37) v2(19.05,38.1) v2(19.05,36.83) v2(19.05,35.56) v2(19.05,34.29) v2(19.05,33.02) v2(19.05,31.75) v2(19.05,30.48) v2(19.05,12.7) v2(19.05,11.43) v2(20.32,44.45) v2(20.32,43.18) v2(20.32,41.91) v2(20.32,40.64) v2(20.32,39.37) v2(20.32,38.1) v2(20.32,36.83) v2(20.32,35.56) v2(20.32,34.29) v2(20.32,29.21) v2(20.32,27.94) v2(20.32,26.67) v2(20.32,22.86) v2(20.32,13.97) v2(20.32,12.7) v2(20.32,10.16) v2(21.59,44.45) v2(21.59,43.18) v2(21.59,41.91) v2(21.59,40.64) v2(21.59,39.37) v2(21.59,38.1) v2(21.59,36.83) v2(21.59,33.02) v2(21.59,31.75) v2(21.59,30.48) v2(21.59,27.94) v2(21.59,26.67) v2(21.59,12.7) v2(22.86,44.45) v2(22.86,43.18) v2(22.86,41.91) v2(22.86,40.64) v2(22.86,39.37) v2(22.86,38.1) v2(22.86,36.83) v2(22.86,34.29) v2(22.86,31.75) v2(22.86,30.48) v2(22.86,29.21) v2(22.86,27.94) v2(22.86,26.67) v2(22.86,10.16) v2(24.13,43.18) v2(24.13,41.91) v2(24.13,40.64) v2(24.13,39.37) v2(24.13,38.1) v2(24.13,36.83) v2(24.13,29.21) v2(24.13,27.94) v2(24.13,10.16) v2(25.4,44.45) v2(25.4,43.18) v2(25.4,36.83) v2(25.4,10.16) v2(26.67,41.91) v2(26.67,40.64) v2(26.67,39.37) v2(27.94,44.45) v2(27.94,43.18) v2(27.94,41.91) v2(27.94,40.64) v2(27.94,39.37) v2(29.21,46.99) v2(29.21,43.18) v2(29.21,41.91) v2(29.21,40.64) v2(30.48,46.99) v2(30.48,44.45) v2(30.48,43.18) v2(30.48,41.91) v2(30.48,40.64) v2(30.48,35.56) v2(30.48,30.48) v2(30.48,16.51) v2(30.48,10.16) v2(31.75,46.99) v2(31.75,45.72) v2(31.75,44.45) v2(31.75,43.18) v2(31.75,41.91) v2(31.75,40.64) v2(31.75,33.02) v2(31.75,30.48) v2(33.02,46.99) v2(33.02,45.72) v2(33.02,44.45) v2(33.02,43.18) v2(33.02,41.91) v2(33.02,40.64) v2(33.02,39.37) v2(33.02,35.56) v2(33.02,34.29) v2(33.02,33.02) v2(33.02,31.75) v2(33.02,30.48) v2(33.02,10.16) v2(33.02,7.62) v2(33.02,6.35) v2(33.02,5.08) v2(33.02,3.81) v2(33.02,2.54) v2(33.02,1.27) v2(34.25,22.55) v2(34.29,45.72) v2(34.29,44.45) v2(34.29,43.18) v2(34.29,41.91) v2(34.29,40.64) v2(34.29,39.37) v2(34.29,38.1) v2(34.29,36.83) v2(34.29,35.56) v2(34.29,21.59) v2(34.29,20.32) v2(34.29,10.16) v2(34.29,7.62) v2(34.29,6.35) v2(34.29,5.08) v2(34.29,3.81) v2(34.29,2.54) v2(34.29,1.27) v2(35.56,45.72) v2(35.56,44.45) v2(35.56,43.18) v2(35.56,41.91) v2(35.56,40.64) v2(35.56,39.37) v2(35.56,38.1) v2(35.56,36.83) v2(35.56,35.56) v2(35.56,21.59) v2(35.56,20.32) v2(35.56,10.16) v2(35.56,7.62) v2(35.56,6.35) v2(35.56,5.08) v2(35.56,3.81) v2(35.56,2.54) v2(36.05,22.47) v2(36.83,44.45) v2(36.83,43.18) v2(36.83,41.91) v2(36.83,40.64) v2(36.83,39.37) v2(36.83,38.1) v2(36.83,36.83) v2(36.83,35.56) v2(36.83,34.29) v2(36.83,30.48) v2(36.83,29.21) v2(36.83,21.59) v2(36.83,20.32) v2(36.83,10.16) v2(36.83,7.62) v2(36.83,6.35) v2(36.83,5.08) v2(36.83,3.81) v2(36.83,2.54) v2(38.1,44.45) v2(38.1,43.18) v2(38.1,41.91) v2(38.1,40.64) v2(38.1,39.37) v2(38.1,38.1) v2(38.1,36.83) v2(38.1,35.56) v2(38.1,34.29) v2(38.1,33.02) v2(38.1,31.75) v2(38.1,30.48) v2(38.1,29.21) v2(38.1,10.16) v2(38.1,7.62) v2(38.1,6.35) v2(38.1,5.08) v2(38.1,3.81) v2(39.37,43.18) v2(39.37,41.91) v2(39.37,40.64) v2(39.37,39.37) v2(39.37,36.83) v2(39.37,33.02) v2(39.37,31.75) v2(39.37,30.48) v2(39.37,26.67) v2(39.37,10.16) v2(39.37,7.62) v2(39.37,6.35) v2(39.37,5.08) v2(40.64,10.16) v2(40.64,5.08) v2(41.91,38.1) v2(41.91,36.83) v2(41.91,33.02) v2(41.91,31.75) v2(41.91,30.48) v2(41.91,29.21) v2(41.91,26.67) v2(41.91,24.13) v2(41.91,22.86) v2(41.91,12.7) v2(41.91,11.43) v2(41.91,10.16) v2(42.13,17.68) v2(43.18,38.1) v2(43.18,36.83) v2(43.18,35.56) v2(43.18,34.29) v2(43.18,33.02) v2(43.18,31.75) v2(43.18,30.48) v2(43.18,29.21) v2(43.18,26.67) v2(43.18,24.13) v2(43.18,12.7) v2(43.18,11.43) v2(43.18,10.16) v2(44.45,38.1) v2(44.45,36.83) v2(44.45,35.56) v2(44.45,34.29) v2(44.45,33.02) v2(44.45,31.75) v2(44.45,30.48) v2(44.45,29.21) v2(44.45,26.67) v2(44.45,25.4) v2(44.45,24.13) v2(44.45,22.86) v2(45.16,33.6) v2(45.72,36.83) v2(45.72,35.56) v2(45.72,34.29) v2(45.72,26.67) v2(45.72,25.4) v2(45.72,24.13) v2(45.72,22.86) v2(45.72,21.59) v2(45.72,20.32) v2(45.72,13.97) v2(46.99,34.29) v2(46.99,26.67) v2(46.99,25.4) v2(46.99,24.13) v2(46.99,22.86) v2(46.99,21.59) v2(46.99,20.32) v2(46.99,19.05) v2(46.99,13.97) v2(47.43,33.06) v2(47.62,31.65) v2(48.26,30.48) v2(48.26,29.21) v2(48.26,27.94) v2(48.26,26.67) v2(48.26,25.4) v2(48.26,24.13) v2(48.26,22.86) v2(48.26,21.59) v2(48.26,20.32) v2(48.26,19.05) v2(48.26,17.78) v2(48.26,16.51)
VBUS: length 109.2
  TOP w0.508: v3(11.48,33.76) 12.39,34.67 12.39,40.9 17.09,45.6 23.08,45.6 23.09,45.61 J47.1
  TOP w0.635: 11.56,33.68 11.87,33.37 C49.1 ; 11.56,33.68 U11.3 ; 11.56,33.68 v3(11.48,33.76)
  SIG w0.635: 9.95,17.3 9.95,9.38 10.88,8.45 16.85,8.45 17.31,7.99 30.69,7.99 31.19,8.48 v2(32.01,8.48) ; 9.95,17.3 v2(9.98,17.27) ; 9.95,17.3 v3(9.95,23.1)
  BOTTOM w0.508: 26.5,12.64 26.5,8.9 26.52,8.88 ; 27,8.4 27.46,7.94 31.47,7.94 v2(32.01,8.48) ; U8.3 14.82,22.47 14.19,23.1 v3(9.95,23.1) ; v2(9.98,17.27) 5.94,17.27 5.32,17.89 J3.2 ; 9.96,26.95 9.95,26.94 ; 9.96,26.95 C33.2 15.94,26.17 15.87,26.1 U8.4 U8.5 ; 9.96,26.95 9.95,26.96
  BOTTOM w0.635: 9.95,26.94 v3(9.95,23.1) ; v3(11.48,33.76) 9.95,32.22 9.95,26.96 ; J48.1 26.52,8.88 27,8.4
VDD_SDIO: length 24.2
  TOP w0.127: U2.26 33.45,17.72 33.26,17.54 33.26,17.54 33.03,17.31 v1(32.9,17.31) 33.12,17.09 R10.1
  TOP w0.254: U3.8 31.24,15.68 v1(31.18,15.74)
  TOP w0.381: U4.8 v1(40.06,15.77) ; v1(31.18,15.74) 31.18,14.99 29.86,14.99 29.8,15.05 29.79,15.05 29.61,15.23 29.61,16.17 29.62,16.18 C24.1 R4.1
  SIG w0.508: v1(40.06,15.77) 40.06,13.94 38.94,12.82 36.94,12.82 36.38,13.38 32.41,13.38 31.18,14.61 v1(31.18,15.74) 32.31,16.87 32.45,16.87 v1(32.9,17.31)
CAM_RESET: length 12.4
  TOP w0.127: U2.13 33.45,23.38 33.17,23.1 32.44,23.1 v1(32.12,23.42)
  BOTTOM w0.127: J2.6 28.9,27.05 30.19,25.76 R35.2 31.67,25.32 31.8,25.19 33.48,25.19 33.68,24.99 33.68,23.58 33.52,23.42 v1(32.12,23.42)
DOVDD_3V3: length 74.2
  TOP w0.127: 39.39,22.23 39.39,22.36 39.41,22.38 ; R16.1 v1(23.86,30.23) ; U2.1 37.65,24.43 37.69,24.47 ; v1(40.07,20.72) 39.65,20.72 39.38,20.98 U2.43 ; R66.1 v1(42.16,13.75) ; U2.19 31.93,21.33 31.83,21.24 31.81,21.24 31.57,20.99 31.55,20.99 31.34,20.79 30.63,20.79 30.25,20.79 29.84,21.2 29.84,21.96 29.71,22.09 v1(29.39,22.09) ; v1(44,13.83) 44.24,13.59 C4.1 ; 37.88,19.2 37.55,19.2 37.3,18.94 U2.37
  TOP w0.203: C9.1 38.17,24.95 v1(37.93,24.71) 37.69,24.47
  TOP w0.254: R9.1 C19.1 v1(29.05,24.53) ; 37.88,19.2 38.22,18.87 v1(38.72,18.87) ; C20.1 39.86,22.83 v1(39.41,23.27) 39.41,22.25 39.2,22.03 38.2,22.03
  TOP w0.381: C20.1 40.06,22.84 C3.1
  TOP w0.635: C11.1 C12.1 C13.1 ; C11.1 v2(37.11,32.5) ; C11.1 35.65,31.37 C10.1 35.66,30.05 L5.2 ; C50.1 13.75,31.3 13.34,30.89 C51.1 10.06,28.06 9.26,28.86 ; v1(8.3,26.77) 9.26,27.73 9.26,28.86 ; U11.4 U11.2 9.26,28.86 ; C48.1 30.18,32.85 v1(31.02,32.01)
  SIG w0.635: v1(37.93,24.71) 38.78,24.71 39.41,24.07 v1(39.41,23.27) 39.41,21.37 v1(40.07,20.72) 39.22,19.86 39.22,19.36 v1(38.72,18.87)
  BOTTOM w0.127: R37.2 40.55,15.39 40.54,15.4 R36.2 40.54,17.24 40.23,17.55 39.59,17.55 38.72,18.42 v1(38.72,18.87)
  BOTTOM w0.254: R30.2 20.22,18.95 v1(20.92,19.65) ; v1(29.05,24.53) 27.62,24.53 J2.11 ; R35.1 v1(32.57,28.91)
  BOTTOM w0.381: R24.2 v1(19.53,29.13)
  BOTTOM w0.508: v1(8.3,26.77) C36.1 C34.1
DTR: length 20.7
  BOTTOM w0.254: R21.1 31.61,33.67 32.1,34.15 J45.3 32.1,38.36 31.7,38.76 28.81,38.76 28.26,38.21 28.26,36.34 28.01,36.09 22.51,36.09 21.57,35.14 Q2.3
DVP_HREF: length 6.5
  TOP w0.127: U2.16 31.33,22.38 v1(31.14,22.58)
  BOTTOM w0.127: v1(31.14,22.58) 31.14,23.04 29.5,24.68 29.5,24.71 29.23,24.97 29.21,24.97 28.63,25.55 J2.9
DVP_PCLK: length 7.2
  TOP w0.127: v1(30.65,21.6) 30.65,22.05 30.65,22.05 30.65,22.72 31.91,23.98 33.1,23.98
  BOTTOM w0.127: v1(30.65,21.6) 30.2,21.6 30.2,21.6 28.64,21.6 28.59,21.55 J2.17
DVP_VSYNC: length 21.1
  TOP w0.127: U2.34 36.25,17.65 37.45,16.45 v1(37.45,15.82)
  SIG w0.127: v1(37.45,15.82) 37.45,22.35 34.55,25.24 31.22,25.24 v1(30.77,25.24)
  BOTTOM w0.127: v1(30.77,25.24) 30.06,25.24 28.75,26.55 J2.7
DVP_Y2: length 18.6
  TOP w0.127: U2.10 34.5,25.25 33.45,26.29 27.63,26.29 26.83,25.49 26.83,21.15 25.98,20.3 v1(25.19,20.3)
  BOTTOM w0.254: v1(25.19,20.3) 25.55,20.66 26.3,20.66 26.41,20.55 J2.19
DVP_Y3: length 6.6
  TOP w0.127: U2.20 31.92,20.98 31.67,20.74 31.66,20.74 31.62,20.7 31.62,20.7 31.37,20.45 v1(29.87,20.45)
  BOTTOM w0.127: J2.21 30.16,19.55 30.28,19.68 30.28,20.04 v1(29.87,20.45)
DVP_Y4: length 8.3
  TOP w0.127: v1(31.28,21.69) 31.31,21.72 31.56,21.72 31.88,22.03 U2.17
  BOTTOM w0.127: v1(31.28,21.69) 31.59,21.38 31.59,21.35 31.85,21.09 31.85,19.44 31.46,19.05 J2.22
DVP_Y5: length 18.6
  TOP w0.127: v1(25.21,19.58) 26.27,19.58 27.15,20.46 27.15,25.37 27.74,25.95 33.43,25.95 34.15,25.24 U2.11
  BOTTOM w0.254: J2.20 26.29,20.05 25.82,19.58 v1(25.21,19.58)
DVP_Y6: length 17.8
  TOP w0.127: 35.2,23.98 35.2,25.26 33.21,27.25 27.31,27.25 26.24,26.19 26.24,22.06 26.24,22.05 v1(26.24,21.41)
  BOTTOM w0.127: J2.18 26.6,21.05 v1(26.24,21.41)
DVP_Y7: length 18.7
  TOP w0.127: U2.7 35.55,25.27 33.31,27.51 32.6,27.51 26.84,27.51 25.89,26.56 25.89,22.62 25.77,22.49 v1(25.77,22.05)
  BOTTOM w0.127: v1(25.77,22.05) 26.21,22.05 J2.16
DVP_Y8: length 19.6
  TOP w0.127: U2.6 35.9,25.28 33.22,27.96 26.49,27.96 25.62,27.09 25.62,23.46 v1(25.21,23.05)
  BOTTOM w0.127: J2.14 v1(25.21,23.05)
DVP_Y9: length 20.3
  TOP w0.127: v1(25.17,23.7) 25.17,27.55 25.86,28.24 33.3,28.24 36.25,25.29 U2.5
  BOTTOM w0.127: v1(25.17,23.7) 25.52,24.05 J2.12
EN: length 42.3
  TOP w0.127: SW2.2 12.62,20.38 12.63,20.37 C40.2 23.82,20.37 24.73,21.28 24.73,27.47 25.73,28.47 25.75,28.49 29.33,28.49 29.48,28.64 C22.1 ; v1(31.49,26.74) 33.36,26.74 34.85,25.25 U2.9 ; C22.1 29.48,29.55 29.47,29.56 R16.2 ; C22.1 v1(31.49,29.11)
  TOP w0.254: R16.2 29.47,30.74 v1(29.47,31.49)
  BOTTOM w0.127: v1(31.49,26.74) v1(31.49,29.11)
  BOTTOM w0.254: Q1.2 27.31,33.64 27.56,33.39 27.56,32.39 27.89,32.05 28.91,32.05 v1(29.47,31.49)
FLASH_CLK: length 7.1
  TOP w0.127: U3.6 30.05,12.47 30.03,12.45 v1(29.44,12.45)
  BOTTOM w0.127: v1(29.44,12.45) 29.44,14.09 29.79,14.44 30.68,14.44 30.99,14.13 R12.2
I2C_SCL: length 21.8
  TOP w0.127: U2.36 36.95,17.73 37.02,17.66 37.02,17.66 37.13,17.54 37.44,17.54 v1(38.1,16.88)
  SIG w0.127: v1(38.1,16.88) 37.76,17.22 37.76,22.6 34.35,26.01 30.71,26.01 v1(29.96,26.76)
  BOTTOM w0.127: J2.5 29.17,27.55 v1(29.96,26.76) ; R36.1 38.71,16.71 38.55,16.88 v1(38.1,16.88)
I2C_SDA: length 28.2
  TOP w0.127: 36.6,18.33 36.6,17.72 36.76,17.56 36.76,17.55 37.99,16.32 v1(37.99,15.21)
  SIG w0.127: v1(30.73,26.81) 31.11,27.18 33.97,27.18 38.14,23.01 38.14,18.22 38.9,17.46 38.9,15.59 38.52,15.21 v1(37.99,15.21)
  BOTTOM w0.127: R37.1 38.69,14.95 38.43,15.21 v1(37.99,15.21) ; J2.3 30.27,28.55 30.73,28.09 v1(30.73,26.81)
IO0: length 39.4
  TOP w0.127: U2.23 31.94,19.93 30.9,18.9 29.84,18.9 ; R45.2 29.85,18.91 29.84,18.9 ; 29.84,18.9 28.46,18.9 27.99,18.42 27.99,17.95 27.67,17.63 v1(21.89,17.63) 21.88,17.64 18.78,17.64 18.75,17.67 C39.2 13.97,17.67 13.96,17.66 13.27,17.66 12.83,17.22 SW1.2
  SIG w0.127: v1(21.89,22.47) v1(21.89,17.63)
  BOTTOM w0.127: Q2.2 20.62,30.52 22.17,28.97 22.17,22.75 v1(21.89,22.47)
IO2: length 28.4
  TOP w0.127: U2.22 31.94,20.28 31.84,20.19 31.83,20.19 31.2,19.56 30.92,19.56 30.91,19.55 30.54,19.55 30.53,19.56 30.53,19.56 30.1,19.99 28.83,19.99 ; v1(11.21,18.31) 13.6,18.31 13.6,18.31 14.08,18.31 14.36,18.6 27.16,18.6 27.32,18.76 27.32,19.65 27.65,19.98 27.89,19.98 27.9,19.99 28.83,19.99 ; 28.83,19.99 28.85,20.01 28.85,20.43 29.19,20.77 R65.2
  BOTTOM w0.127: v1(11.21,18.31) 7.25,18.31
IO4: length 9.9
  TOP w0.127: v1(32.01,18.54) 32.55,19.08 U2.24
  BOTTOM w0.127: J2.13 28.59,23.55 30.01,22.13 31.58,22.13 32.43,21.29 32.43,18.96 v1(32.01,18.54)
IO12: length 6.9
  TOP w0.127: 30.2,22.65 30.19,22.67 R64.2 ; 30.2,22.65 30.45,22.9 R9.2 ; 30.2,22.65 30.2,21.42 30.55,21.07 31.27,21.07 31.44,21.25 31.46,21.25 31.72,21.51 31.72,21.51 31.9,21.68 U2.18
IO15: length 27.5
  TOP w0.127: SW3.2 12.64,24.74 12.64,24.74 ; 12.64,24.74 12.35,24.74 v1(12.34,24.73) ; 12.64,24.74 C38.2 13.52,24.74 13.72,24.94 22.62,24.94 23.9,23.67 v1(23.9,21.16) ; v1(30.73,19.99) 31.27,19.99 31.72,20.44 31.72,20.44 31.77,20.48 31.78,20.48 31.93,20.63 U2.21
  SIG w0.127: v1(30.73,19.99) 31.17,19.99 31.39,20.21 31.39,20.58 31.11,20.86 30.09,20.86 30.05,20.89 29.81,20.89 29.79,20.9 29.43,20.9 29.38,20.86 24.21,20.86 24.03,21.05 24.01,21.05 v1(23.9,21.16)
  BOTTOM w0.254: 12.34,24.22 12.34,24.23 v1(12.34,24.73)
IO16: length 16.8
  TOP w0.127: 32.23,15.59 32.67,15.15 32.79,15.15 32.87,15.06 U4.1 ; 32.23,15.59 32.23,15.94 ; 32.23,15.59 32.22,15.6 R10.2 32.22,16.95 v1(32.22,17.56) 32.99,18.33 33.1,18.33
  BOTTOM w0.127: v1(21.27,16.94) 21.82,16.94 22.44,17.56 26.37,17.56 26.39,17.58 26.76,17.58 26.78,17.56 v1(32.22,17.56)
IO17: length 3.5
  TOP w0.127: U2.27 33.8,17.82 33.8,17.64 33.73,17.57 v1(33.73,17.28)
  BOTTOM w0.127: R13.1 33.96,15.46 33.97,15.47 33.97,15.66 33.8,15.83 R11.2 33.73,16.43 v1(33.73,17.28)
IO19: length 5.6
  TOP w0.127: U2.38 38.9,18.33 41.51,15.72 R49.2
IO21: length 53.4
  TOP w0.127: U2.42 39.36,20.63 39.46,20.54 39.46,20.54 40.4,19.59 v1(41.22,19.59) ; R26.1 17.77,14.77 17.81,14.73 R25.2 17.81,13.48 17.93,13.36 20.61,13.36 ; 20.61,13.36 20.6,13.35 RED.1 ; 20.61,13.36 v1(21.05,13.36)
  SIG w0.127: v1(46.28,19.59) 46.28,20.08 46.29,20.08 46.29,28.58 46,28.87 J46.2 ; v1(41.52,13.51) 41.05,13.51 39.17,11.63 31.4,11.63 29.26,13.77 21.46,13.77 v1(21.05,13.36)
  BOTTOM w0.127: v1(41.52,13.51) 41.52,18.85 41.22,19.15 v1(41.22,19.59) v1(46.28,19.59)
IO22: length 33.3
  TOP w0.127: v1(20.89,16.19) 21.36,16.19 21.38,16.17 21.55,16.17 WHITE.1 ; U2.39 38.78,19.58 39.31,19.05 39.31,18.7 v1(39.63,18.38)
  SIG w0.127: v1(20.89,16.19) 28.45,16.19 32.76,11.88 39.06,11.88 40.86,13.68 40.86,17.15 v1(39.63,18.38)
  BOTTOM w0.127: v1(20.89,16.19) R31.2 20.24,15.75 ; R32.1 20.24,15.36 ; 20.24,15.36 20.24,15.75 20.24,15.75 ; 20.24,15.36 20.24,15.36 20.24,15.75
PWDN: length 7
  TOP w0.127: v1(31.8,22.87) 31.94,22.73 U2.15
  BOTTOM w0.127: v1(31.8,22.87) 31.66,23.01 R34.2 30.58,24.2 28.73,26.05 J2.8
RTS: length 8.7
  BOTTOM w0.254: 27.51,34.61 27.48,34.64 Q1.3 ; 27.51,34.61 28.8,34.61 29.56,35.37 29.56,36.35 29.56,36.35 J45.2 ; 27.51,34.61 25.85,34.61 25.66,34.8 R70.1
RXD0: length 45.4
  TOP w0.127: v1(39.93,37.99) 39.21,38.71 v1(24.98,38.71) ; v1(40.19,18.72) 39.87,19.04 39.87,19.21 39.15,19.93 U2.40
  SIG w0.127: v1(39.93,37.99) 40.89,37.03 40.89,20.23 40.74,20.09 40.58,19.92 40.58,19.11 v1(40.19,18.72)
  BOTTOM w0.127: J47.2 26.76,43.4 24.98,41.62 v1(24.98,38.71)
SCK/CLK: length 7
  TOP w0.127: 35.2,18.33 35.2,17.54 35.69,17.04 35.69,16.74 35.69,16.74 35.69,16.28 35.11,15.7 v1(32.89,15.7)
  BOTTOM w0.127: v1(32.89,15.7) 32.89,16.35 R11.1 ; v1(32.89,15.7) 32.89,15.35 32.88,15.34 ; v1(32.89,15.7) 32.85,15.66 R12.1
SCS/CMD: length 14.9
  TOP w0.127: U3.1 25.24,15.81 v1(26.57,17.14) ; v1(35.19,16.69) 35.19,17.14 34.85,17.48 U2.30
  SIG w0.127: v1(35.19,16.69) 35.19,17.64 34.76,18.07 30.21,18.07 28.96,16.82 26.89,16.82 v1(26.57,17.14)
SDI/SD1: length 19.2
  TOP w0.127: U3.5 32.33,11.2 v1(32.36,11.18) 31.18,11.18 ; U4.5 39.99,11.18 v1(38.81,11.18) 38.37,11.18 38.36,11.17 37.56,11.17 36.97,11.76 36.97,16.54 36.27,17.23 36.27,17.24 35.9,17.62 U2.33
  BOTTOM w0.127: v1(32.36,11.18) v1(38.81,11.18)
SDO/SD0: length 18.8
  TOP w0.127: 27.91,13.72 25.18,13.72 ; 27.91,13.72 27.89,13.74 U3.2 ; 27.91,13.72 28.6,13.72 29.26,13.07 32.44,13.07 32.56,13.2 32.56,13.51 32.84,13.79 32.87,13.79 32.87,13.79 U4.2 35.66,13.79 36.02,14.15 36.02,17.14 35.54,17.62 35.54,18.32 U2.32
SHD/SD2: length 21.1
  TOP w0.127: v1(34.33,17.02) 34.17,17.17 34.17,17.46 34.15,17.49 U2.28 ; v1(38.21,17.53) 38.6,17.14 v1(38.6,13.72) 39.99,13.72 U4.7 ; U3.7 31.22,13.72 v1(29.97,13.72)
  BOTTOM w0.127: v1(38.21,17.53) 34.84,17.53 v1(34.33,17.02) ; v1(29.97,13.72) 30.29,13.41 38.29,13.41 v1(38.6,13.72)
SPI_CLK: length 0.8
  TOP w0.127: R45.1 28.2,19.39 TP2.1 28.18,19.35
SPI_CS: length 2.1
  TOP w0.127: R49.1 43.06,15.07 R66.2 43.06,14.07 43.06,14.07 TP1.1
SPI_DATAIN: length 1.3
  TOP w0.127: R65.1 27.85,21.22 27.71,21.08 TP4.1
SPI_DATAOUT: length 0.9
  TOP w0.254: R64.1 TP3.1
SRAM_CLK: length 7.8
  TOP w0.127: v1(38.02,14.4) 38.02,13.02 38.51,12.52 U4.6
  BOTTOM w0.127: v1(38.02,14.4) 37.57,14.4 37.29,14.12 R13.2
SWP/SD3: length 22.7
  TOP w0.127: v1(34.63,16.38) 34.68,16.42 34.68,16.74 34.77,16.83 34.77,17.2 34.5,17.48 U2.29 ; 26.64,12.45 26.61,12.47 U3.3 ; 26.64,12.45 25.18,12.45 ; 26.64,12.45 26.98,12.8 28.87,12.8 29,12.67 29,12.02 29.15,11.87 v1(29.8,11.87) ; U4.3 34.08,12.51 v1(35.39,12.51) 36.5,13.62 v1(36.5,16.38)
  BOTTOM w0.127: v1(29.8,11.87) 32.22,11.87 32.86,12.51 v1(35.39,12.51) ; v1(34.63,16.38) 34.95,16.07 36.18,16.07 v1(36.5,16.38)
TXD0: length 91.9
  TOP w0.127: R3.2 v1(45.29,11.4) ; v1(7.54,11.23) 7.54,10.78 7.92,10.41 v1(12.21,10.41)
  SIG w0.127: v1(12.21,10.41) 18.97,10.41 19.8,11.24 30.63,11.24 31.14,10.73 32.78,10.73 32.78,10.73 43.42,10.73 43.42,10.73 45.16,10.73 45.29,10.86 v1(45.29,11.4) ; J47.3 27.65,47.26 19.06,47.26 8.54,36.74 8.54,28.37 7.54,27.37 v1(7.54,11.23)
N16845223: length 2.6
  TOP w0.127: v1(19.52,14.48) 19.16,14.12 R25.1
  BOTTOM w0.127: v1(19.52,14.48) 18.55,14.48 18.33,14.26 18.33,13.93 U9.2
N16845246: length 18.2
  SIG w0.127: v1(19.44,15.19) 19.44,27.52 v1(17.6,29.37)
  BOTTOM w0.127: D5.2 15.63,29.02 15.98,29.37 v1(17.6,29.37) ; U9.6 v1(19.44,15.19)
N16845248: length 1.1
  BOTTOM w0.381: D5.1 R24.1
N16845297: length 4.9
  BOTTOM w0.381: D6.2 15.74,14.77 16.59,13.92 U9.3
N16845299: length 1.7
  BOTTOM w0.381: R30.1 18.76,17.37 18.75,17.38 D6.1
N16845342: length 1.9
  BOTTOM w0.127: R31.1 18.54,16.19 18.34,15.99 U9.5
N16860839: length 6.6
  TOP w0.127: 38.2,22.73 38.2,23.23 38.57,23.61 38.57,23.61 39.5,24.54 39.5,24.84 39.51,24.85 39.51,25.71 39.67,25.87 R1.2 C6.2 41.91,25.87 C5.1
N16860948: length 7
  TOP w0.127: 36.6,24.9 36.6,23.98 U2.3
  TOP w0.203: 36.6,24.9 36.6,25.38 35.66,26.32 35.66,28.44 35.67,28.45 L5.1 C21.1
N16861170: length 4.1
  TOP w0.635: R14.2 39.89,27.67 R15.1 C15.2 37.3,27.66 C14.2
N16861179: length 8.7
  TOP w0.127: U1.3 43.9,19.05 42.84,20.11 41.54,20.11 41.35,20.3 41.35,20.82 40.98,21.19 39.65,21.19 39.51,21.33 U2.44
  TOP w0.254: C2.1 U1.3
N16861214: length 3.1
  TOP w0.254: R2.1 41.69,21.76 U1.1 42.3,22.06 C1.1
N16861260: length 5
  TOP w0.127: U2.47 38.8,22.38 38.87,22.45 38.87,22.45 38.99,22.57 38.99,23.07 38.95,23.1 38.95,23.63 R1.1 C6.1
N16861530: length 12.2
  TOP w0.127: U2.41 39.26,20.28 40.63,18.91 40.63,18.9 40.96,18.57 40.96,17.05 41.5,16.51 43.79,16.51 44.91,15.4 44.91,13.4 R3.1
N16861598: length 1.9
  TOP w0.127: R2.2 39.35,21.76 39.28,21.68 U2.45
N16861944: length 3.6
  TOP w0.635: J39.1 40.8,29.87 40.79,29.86 R14.1
N16863419: length 2.7
  TOP w0.635: R15.2 C43.2 L6.1
N16863538: length 2.6
  TOP w0.635: L6.2 C44.2 46.97,27.66 TP5.1
N16884685: length 3.8
  TOP w0.127: L4.1 36.85,26.77 C14.1
  TOP w0.254: U2.2 37.3,25.15 37.29,25.16 37.29,25.66
  TOP w0.635: C14.1 37.29,25.66
N16908427: length 2.2
  BOTTOM w0.254: R70.2 23.57,33.9 22.52,32.84 Q2.1
N16908429: length 1.9
  BOTTOM w0.254: R21.2 28.78,32.77 28.43,33.11 Q1.1

## Copper pours and planes (outline as drawn; the poured copper is in the pictures)
AGND on GND: 22.88,30.67 24.9,30.67 25.21,30.98 25.21,31.89 25.1,32 22.16,32 20.63,30.47 20.63,26.78 19.74,25.89 16.48,25.89 15.05,24.46 15.05,19.26 16.14,18.17 18.51,18.17 19.07,17.61 19.07,16.17 20.68,14.56 22.8,14.56 23.14,14.9 23.14,15.64 23,15.78 20.37,15.78 20.13,16.02 20.13,17.92 17.04,21.01 17.04,24.11 18.23,25.3 21.71,25.3 22.84,26.43 22.84,30.63
GND on TOP: 43.19,42.03 43.59,40.19 49.75,23.85 43.59,7.51 43.19,5.66 41.34,5.26 37.29,2.37 32.75,0.35 32.75,7.76 17.25,7.76 17.25,0.35 12.71,2.37 8.66,5.26 6.82,5.66 6.42,7.51 0.25,23.85 6.42,40.19 6.82,42.03 8.66,42.43 25,48.6 41.34,42.43 ; 9 cut-outs
GND on BOTTOM: 43.19,42.03 43.59,40.19 49.75,23.85 43.59,7.51 43.19,5.66 41.34,5.26 37.29,2.37 32.75,0.35 32.75,7.76 17.25,7.76 17.25,0.35 12.71,2.37 8.66,5.26 6.82,5.66 6.42,7.51 0.25,23.85 6.42,40.19 6.82,42.03 8.66,42.43 25,48.6 41.34,42.43 ; 4 cut-outs
GND on GND: 43.19,42.03 43.59,40.19 49.75,23.85 43.59,7.51 43.19,5.66 41.34,5.26 37.29,2.37 32.75,0.35 32.75,7.76 17.25,7.76 17.25,0.35 12.71,2.37 8.66,5.26 6.82,5.66 6.42,7.51 0.25,23.85 6.42,40.19 6.82,42.03 8.66,42.43 25,48.6 41.34,42.43
DOVDD_3V3 on SIG: 43.19,42.03 43.59,40.19 49.75,23.85 43.59,7.51 43.19,5.66 41.34,5.26 37.29,2.37 32.75,0.35 32.75,7.76 17.25,7.76 17.25,0.35 12.71,2.37 8.66,5.26 6.82,5.66 6.42,7.51 0.25,23.85 6.42,40.19 6.82,42.03 8.66,42.43 25,48.6 41.34,42.43 ; 7 cut-outs

## Text on the board
Ref Des/Silkscreen Bottom: IO12 | GND | IO16 | 3.3V | IO14 | IO2 | IO15 | IO13 | IO0 | 5V | RXD0 | TXD0 | RTS | DTR
Ref Des/Silkscreen Top: FUN | RST | FLSH
NCLEGEND-1-4: FIGURE | SIZE | 0.3048 | 0.508 | 0.635 | 0.71 | 0.9 | 1.2x0.72 | DRILL CHART: TOP to BOTTOM | ALL UNITS ARE IN MILLIMETERS | PLATED | QTY | 91 | 463 | 2 | 10
